# EAGLE board LeiterplatteEnergieversorgung (EAGLE 9.7.0)
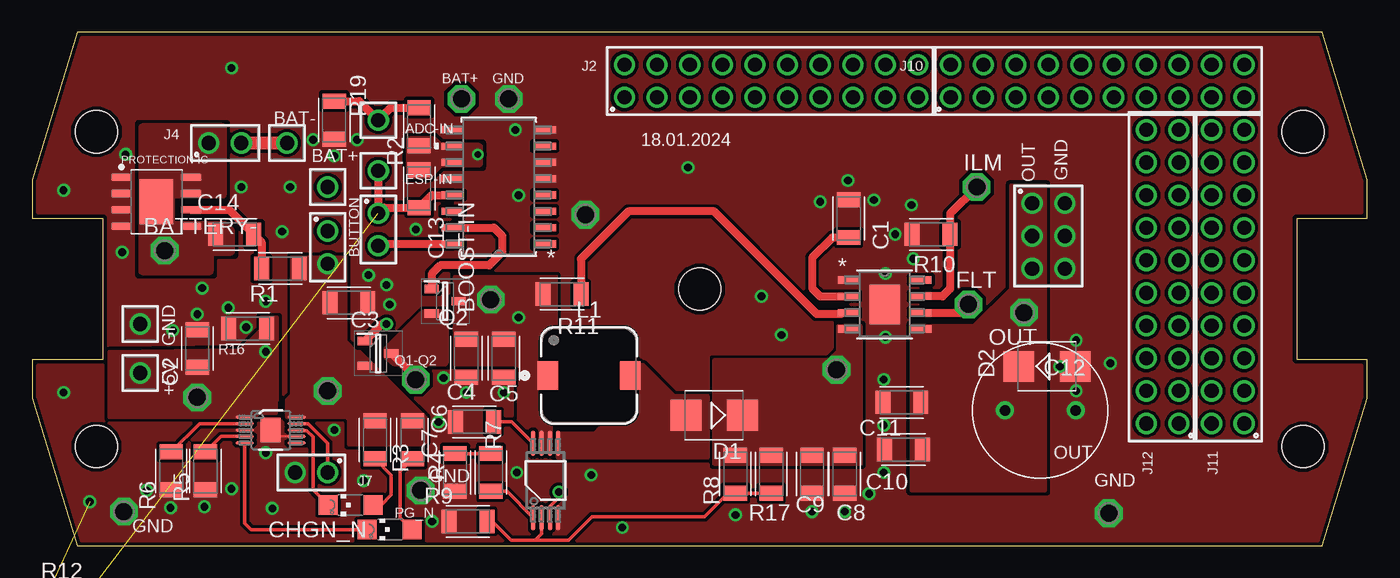
[diagram p0: board, top side]
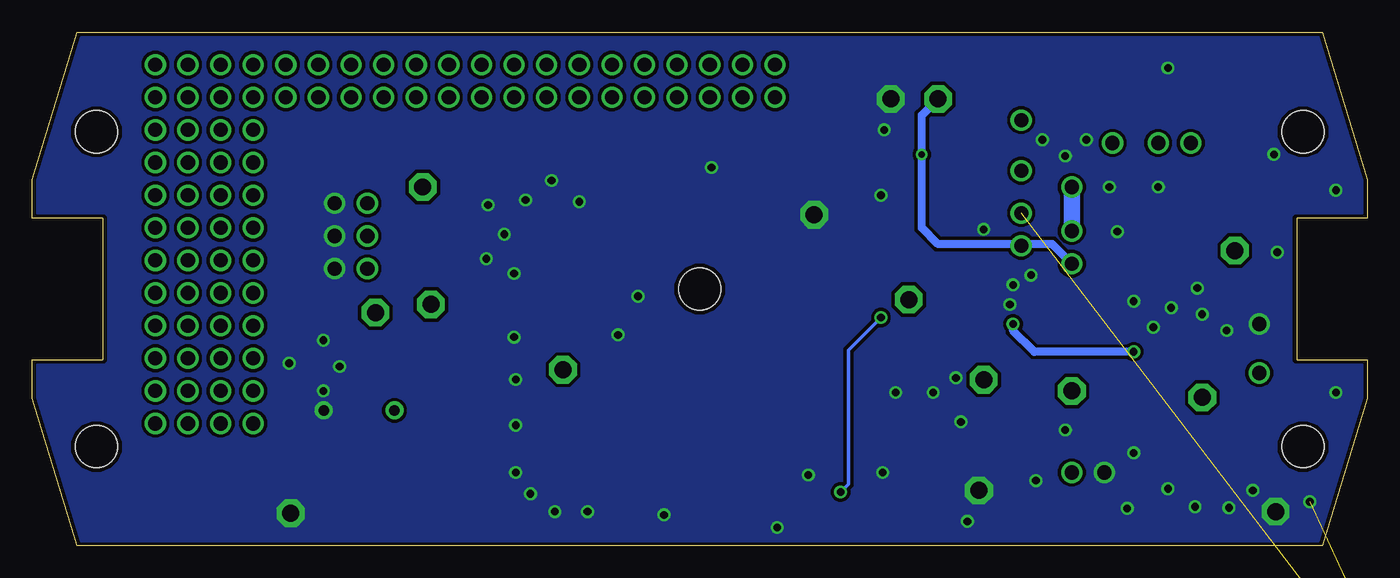
[diagram p1: board, bottom side, seen from below]

Size 104 x 40 mm. Coordinates in mm from the lower left corner, seen from the top.
Outline: 3.5,0 100.5,0 104,11.5 104,14.5 98.5,14.5 98.5,25.5 104,25.5 104,28.5 100.5,40 3.5,40 0,28.5 0,25.5 5.5,25.5 5.5,14.5 0,14.5 0,11.5 3.5,0
Copper layers (1*16): Top / Bottom
Stack-up Default Layer Stack: Top User Defined 0.035mm / Dielectric-1 User Defined 1.5mm / Bottom User Defined 0.035mm
Design rules: minimum copper width 0.2mm, minimum drill size 0.3mm, copper clearance wire_polygon to wire_polygon 0.15mm, copper clearance wire_polygon to pad_smd 0.15mm, copper clearance wire_polygon to via 0.15mm, copper clearance pad_smd to pad_smd 0.15mm, copper clearance pad_smd to via 0.15mm, copper clearance via to via 0.15mm, copper clearance smd to pad (same net) 0mil, copper clearance smd to via (same net) 0mil, copper clearance smd to smd (same net) 0mil, dimension clearance 0.3mm, via restrict clearance 0mil, restrict clearance 0mil, drill distance 0.3mm, keepout clearance 0mil
Holes 3.3 mm at 98.99,7.73 98.99,32.24 5.01,32.24 5.01,7.73 52,20

## Footprints (pad centres in the part's own frame; a part is rotated, then mirrored left to right if it is on the bottom)
61300111121 = drill 1.1: 1 0,0
DGQ0010D_NV_L = smd 1.45 x 0.25: 1 -2.025,1; 2 -2.025,0.5; 3 -2.025,0; 4 -2.025,-0.5; 5 -2.025,-1; 6 2.025,-1; 7 2.025,-0.5; 8 2.025,0; 9 2.025,0.5; 10 2.025,1 | smd 1.57 x 1.88: 11 0,0
P1-13 = drill 1.321 pad 2.159 octagon: TP 0,0
PW0008A_M = smd 2 x 0.35: 1 -2.9,0.975; 2 -2.9,0.325; 3 -2.9,-0.325; 4 -2.9,-0.975; 5 2.9,-0.975; 6 2.9,-0.325; 7 2.9,0.325; 8 2.9,0.975
61300211121 = drill 1.1: 1 -1.27,0; 2 1.27,0
CAPC3216X135 = smd 1.165 x 1.815: 1 -1.475,0; 2 1.475,0
CAPRD550W60D1025H1250B = drill 0.8 pad 1.4: 1 -2.75,0; 2 2.75,0
CHIPLED_1206 = smd 1.5 x 1.5: A 0,-1.75; C 0,1.75
SMB = smd 2.4 x 2.4: A 2.2,0; C -2.2,0
SOIC_20DDAR_TEX-M = smd 1.655 x 0.558: 1 -2.821,1.905; 2 -2.821,0.635; 3 -2.821,-0.635; 4 -2.821,-1.905; 5 2.821,-1.905; 6 2.821,-0.635; 7 2.821,0.635; 8 2.821,1.905 | smd 2.388 x 3.099: EPAD 0,0
NS16 = smd 1.741 x 0.558: 1 -3.581,4.445; 2 -3.581,3.175; 3 -3.581,1.905; 4 -3.581,0.635; 5 -3.581,-0.635; 6 -3.581,-1.905; 7 -3.581,-3.175; 8 -3.581,-4.445; 9 3.581,-4.445; 10 3.581,-3.175; 11 3.581,-1.905; 12 3.581,-0.635; 13 3.581,0.635; 14 3.581,1.905; 15 3.581,3.175; 16 3.581,4.445
61302021121 = drill 1.1: 1 -11.43,-1.27; 2 -11.43,1.27; 3 -8.89,-1.27; 4 -8.89,1.27; 5 -6.35,-1.27; 6 -6.35,1.27; 7 -3.81,-1.27; 8 -3.81,1.27; 9 -1.27,-1.27; 10 -1.27,1.27; 11 1.27,-1.27; 12 1.27,1.27; 13 3.81,-1.27; 14 3.81,1.27; 15 6.35,-1.27; 16 6.35,1.27; 17 8.89,-1.27; 18 8.89,1.27; 19 11.43,-1.27; 20 11.43,1.27
61300621121 = drill 1.1: 1 -2.54,-1.27; 2 -2.54,1.27; 3 0,-1.27; 4 0,1.27; 5 2.54,-1.27; 6 2.54,1.27
WE-PD_7345 = smd 1.6 x 2.2: 1 -3.2,0; 2 3.2,0
XB8089D = smd 1.6 x 0.61: 1 -2.7,1.905; 2 -2.7,0.635; 3 -2.7,-0.635; 4 -2.7,-1.905; 5 2.7,-1.905; 6 2.7,-0.635; 7 2.7,0.635; 8 2.7,1.905 | smd 2.62 x 3.51: 9 0,0
SOT96P240X110-3N = smd 1.1 x 0.65: 1 -1.05,0.96; 2 -1.05,-0.96; 3 1.05,0
RESC3216X70 = smd 1.165 x 1.815: 1 -1.475,0; 2 1.475,0

## Placement (x,y rotation side)
ADC-IN  [61300111121]  26.96,33.15 180 top
BAT-CHRGR  BQ24092DGQRDGQ0010D_NV_L  [DGQ0010D_NV_L]  18.58,9.02 0 top
BATTERY+  TPSQPAD1-13  [P1-13]  33.44,34.8 0 top
BATTERY+1  TPSQPAD1-13  [P1-13]  23.03,12.06 180 top
BATTERY-  TPSQPAD1-13  [P1-13]  10.33,22.99 0 top
BOOST-IC  TPS61085PWPW0008A_M  [PW0008A_M]  40,5.09 90 top
BOOST-IN  TPSQPAD1-13  [P1-13]  35.73,19.18 90 top
BOOST-OUT  TPSQPAD1-13  [P1-13]  62.65,13.72 90 top
BUTTON  [61300211121]  26.96,24.64 270 top
C1  10n  [CAPC3216X135]  63.6,25.48 270 top
C2  10u  [CAPC3216X135]  12.87,15.37 90 top
C3  10u  [CAPC3216X135]  24.68,18.92 0 top
C4  10u  [CAPC3216X135]  33.82,14.61 270 top
C5  1u  [CAPC3216X135]  36.74,14.61 270 top
C6  100n  [CAPC3216X135]  34.46,9.65 180 top
C7  3.3n  [CAPC3216X135]  32.93,5.71 270 top
C8  10u  [CAPC3216X135]  63.28,5.59 270 top
C9  10u  [CAPC3216X135]  60.74,5.59 270 top
C10  100n  [CAPC3216X135]  67.86,7.49 180 top
C11  470n  [CAPC3216X135]  67.73,11.18 180 top
C12  330u  [CAPRD550W60D1025H1250B]  78.53,10.54 0 top
C13  100n  [CAPC3216X135]  30.15,27.81 90 top
C14  10u  [CAPC3216X135]  15.79,24.26 180 top
CHGN_N  [CHIPLED_1206]  24.8,3.17 90 top
D1  [SMB]  53.12,10.16 180 top
D2  [SMB]  79.03,13.97 0 top
E-FUSE  TPS259620DDARSOIC_20DDAR_TEX-M  [SOIC_20DDAR_TEX-M]  66.4,18.8 0 top
ESP-IN  [61300111121]  26.96,29.21 180 top
FLIP-FLOP  CD4027BNSRNS16  [NS16]  36.34,27.95 180 top
FLT  TPSQPAD1-13  [P1-13]  72.94,18.8 0 top
GND  TPSQPAD1-13  [P1-13]  30.27,4.32 0 top
GND1  TPSQPAD1-13  [P1-13]  7.15,2.67 90 top
GND2  TPSQPAD1-13  [P1-13]  43.09,25.78 90 top
ILM  TPSQPAD1-13  [P1-13]  73.57,27.94 0 top
INPUT-CHARGER  TPSQPAD1-13  [P1-13]  12.87,11.56 90 top
J1  [61300111121]  8.42,17.27 0 top
J2  [61302021121]  57.57,36.2 0 top
J3  [61300111121]  23.03,27.94 0 top
J4  [61300211121]  15.03,31.37 0 top
J5  [61300211121]  23.03,23.24 270 top
J6  [61300111121]  19.85,31.37 0 top
J7  [61300211121]  21.76,5.71 180 top
J8  [61300111121]  8.42,13.46 0 top
J9  [61300621121]  79.16,24.13 270 top
J10  [61302021121]  82.97,36.2 0 top
J11  [61302021121]  93.13,20.95 90 top
J12  [61302021121]  88.05,20.95 90 top
L1  3.3uH  [WE-PD_7345]  43.37,13.26 0 top
OUT  TPSQPAD1-13  [P1-13]  77.25,18.16 180 top
PG_N  [CHIPLED_1206]  27.85,1.27 90 top
PROTECTION-IC  XB8089D  [XB8089D]  9.69,26.8 0 top
Q1  DMP3098L-7  [SOT96P240X110-3N]  26.96,14.99 0 top
Q1-Q2  TPSQPAD1-13  [P1-13]  29.88,12.94 180 top
Q2  DMP3098L-7  [SOT96P240X110-3N]  32.17,19.05 0 top
R1  1k  [RESC3216X70]  19.34,21.59 180 top
R2  100k  [RESC3216X70]  30.14,32.64 90 top
R3  1.5k  [RESC3216X70]  26.71,8.26 90 top
R4  1.5k  [RESC3216X70]  29.63,8.26 90 top
R5  1k  [RESC3216X70]  13.5,5.84 90 top
R6  526  [RESC3216X70]  10.83,5.84 90 top
R7  13k  [RESC3216X70]  35.73,5.71 270 top
R8  84,5k  [RESC3216X70]  54.78,5.59 90 top
R9  18k  [RESC3216X70]  33.95,1.91 0 top
R10  500  [RESC3216X70]  70.02,24.26 0 top
R11  100k  [RESC3216X70]  41.27,19.6 0 top
R12  10k  [RESC3216X70]  2.33,-4.45 0 top  (outside the outline)
R16  100k  [RESC3216X70]  16.8,16.92 0 top
R17  158k  [RESC3216X70]  57.57,5.59 90 top
R19  100k  [RESC3216X70]  23.53,33.15 270 top
TP16  TPSQPAD1-13  [P1-13]  37.12,34.8 0 top
USB-GND  TPSQPAD1-13  [P1-13]  83.86,2.54 0 top

## Library data of the parts
ADC-IN ESP-IN J1 J3 J6 J8 = 61001021121_Eagle_WR-PHD_rev19a; DATASHEET-URL: https://katalog.we-online.com/em/datasheet/61300111121.pdf; GENDER: Pin Header; IR: 3A; MATES: WR-PHD 2.54mm Angled Socket Header /SMT Socket Header/Socket Header; PACKAGING: Bag; PART-NUMBER: 61300111121; PINS: 1; ROWS: Single; TYPE: Straight
BAT-CHRGR = BQ24092DGQR; COPYRIGHT: Copyright (C) 2023 Ultra Librarian. All rights reserved.; MANUFACTURER_PART_NUMBER: BQ24092DGQR; MFR_NAME: Texas Instruments; REFDES: RefDes; TYPE: TYPE
BATTERY+ BATTERY+1 BATTERY- BOOST-IN BOOST-OUT FLT GND GND1 GND2 ILM INPUT-CHARGER OUT Q1-Q2 TP16 USB-GND = testpad
BOOST-IC = Bibliothek; COPYRIGHT: Copyright (C) 2023 Ultra Librarian. All rights reserved.; MANUFACTURER_PART_NUMBER: TPS61085PW; MFR_NAME: Texas Instruments; REFDES: RefDes; TYPE: TYPE
BUTTON J4 J5 J7 = 61001021121_Eagle_WR-PHD_rev19a; DATASHEET-URL: https://katalog.we-online.com/em/datasheet/61300211121.pdf; GENDER: Pin Header; IR: 3A; MATES: WR-PHD 2.54mm Angled Socket Header /SMT Socket Header/Socket Header; PACKAGING: Bag; PART-NUMBER: 61300211121; PINS: 2; ROWS: Single; TYPE: Straight
C1-C14 = Capacitor; CATEGORY: Capacitor
CHGN_N PG_N = LED
D1 D2 = Diode
E-FUSE = TPS259620DDAR; COPYRIGHT: Copyright (C) 2023 Ultra Librarian. All rights reserved.; MANUFACTURER_PART_NUMBER: TPS259620DDAR; MFR_NAME: Texas Instruments
FLIP-FLOP = CD4027B; COPYRIGHT: Copyright (C) 2023 Ultra Librarian. All rights reserved.; MANUFACTURER_PART_NUMBER: CD4027BNSR; MFR_NAME: Texas Instruments
J2 J10-J12 = 61001021121_Eagle_WR-PHD_rev19a; DATASHEET-URL: https://katalog.we-online.com/em/datasheet/61302021121.pdf; GENDER: Pin Header; IR: 3A; MATES: WR-PHD 2.54mm Angled DualSocket Header/Dual Socket Header/Dual Socket Header Bottom Entry/Dual Socket Header Bottom Entry Large/SMT Dual Socket Header/SMT Dual Socket Header Bottom Entry; PACKAGING: Bag; PART-NUMBER: 61302021121; PINS: 20; ROWS: Dual; TYPE: Board Stacker
J9 = 61001021121_Eagle_WR-PHD_rev19a; DATASHEET-URL: https://katalog.we-online.com/em/datasheet/61300621121.pdf; GENDER: Pin Header; IR: 3A; MATES: WR-PHD 2.54mm Angled DualSocket Header/Dual Socket Header/Dual Socket Header Bottom Entry/Dual Socket Header Bottom Entry Large/SMT Dual Socket Header/SMT Dual Socket Header Bottom Entry; PACKAGING: Bag; PART-NUMBER: 61300621121; PINS: 6; ROWS: Dual; TYPE: Board Stacker
L1 = Eagle_WE-PD; DATASHEET-URL: https://www.we-online.com/redexpert/spec/744777001?ae; FRES: 100MHz; IR: 6.84A; ISAT: 10.2A; MOUNT: SMT; PART-NUMBER: 744777001; RDC-MAX: 10mohm; RDC-TYP: 8.4mohm; SIZE: 7345; VERSION: Standard
PROTECTION-IC = XB8089D
Q1 Q2 = DMP3098L; DESCRIPTION: P-CHANNEL ENHANCEMENT MODE MOSFET; HEIGHT: 1.1mm; MANUFACTURER_NAME: Diodes Incorporated; MANUFACTURER_PART_NUMBER: DMP3098L-7; MOUSER_PART_NUMBER: 621-DMP3098L-7; MOUSER_PRICE-STOCK: https://www.mouser.co.uk/ProductDetail/Diodes-Incorporated/DMP3098L-7?qs=ptj1V1atRAptfFGa76gfNw%3D%3D
R1-R12 R16 R17 R19 = Resistor; CATEGORY: Resistor; SUB-CATEGORY: Fixed

## Nets
+5V: BAT-CHRGR.1 C2.1 INPUT-CHARGER.TP J8.1 Q1.1 R16.2
ADC-IN: ADC-IN.1 R2.2 R19.1
BAT-IN+: J3.1 J5.1
BAT-IN-: J4.2 J6.1
BATTERY+: BAT-CHRGR.10 BATTERY+1.TP BATTERY+.TP BUTTON.2 C3.1 C13.2 FLIP-FLOP.10 FLIP-FLOP.11 FLIP-FLOP.16 J5.2 Q1.2 R1.1 R2.1 R3.2 R4.2
BATTERY-: BATTERY-.TP C14.2 J4.1 PROTECTION-IC.5 PROTECTION-IC.7 PROTECTION-IC.8 PROTECTION-IC.9
BOOST-IN: BOOST-IC.3 BOOST-IC.6 BOOST-IC.7 BOOST-IN.TP C4.1 C5.1 L1.1 Q2.3 R11.1
BOOST-OUT: BOOST-OUT.TP C8.1 C9.1 D1.C E-FUSE.4 R8.2 R17.2
CHGN_N: BAT-CHRGR.8 CHGN_N.C
COMP: BOOST-IC.1 R7.2
DV/DT: C1.2 E-FUSE.2
EN: E-FUSE.3 R11.2
FB: BOOST-IC.2 R8.1 R9.2 R17.1
FF-IN: BUTTON.1 C13.1 ESP-IN.1 FLIP-FLOP.13 R12.2
FF-OUT: FLIP-FLOP.15 Q2.1
FLT: E-FUSE.6 FLT.TP
GND: BAT-CHRGR.3 BAT-CHRGR.7 BAT-CHRGR.11 BOOST-IC.4 C1.1 C2.2 C3.2 C4.2 C5.2 C6.2 C7.2 C8.2 C9.2 C10.2 C11.2 C12.2 D2.A E-FUSE.1 E-FUSE.EPAD FLIP-FLOP.5 FLIP-FLOP.6 FLIP-FLOP.8 FLIP-FLOP.9 FLIP-FLOP.12 GND1.TP GND2.TP GND.TP J1.1 J7.2 J9.2 J9.4 J9.6 PROTECTION-IC.1 PROTECTION-IC.2 PROTECTION-IC.3 PROTECTION-IC.4 R5.1 R6.1 R9.1 R10.1 R12.1 R16.1 R19.2 TP16.TP USB-GND.TP
ILM: E-FUSE.7 ILM.TP R10.2
ISET: BAT-CHRGR.2 R6.2
N$3: C14.1 PROTECTION-IC.6 R1.2
N$9: CHGN_N.A R3.1
N$10: PG_N.A R4.1
N$19: C7.1 R7.1
OUT: C10.1 C11.1 C12.1 D2.C E-FUSE.5 J9.1 J9.3 J9.5 OUT.TP
PG_N: BAT-CHRGR.5 PG_N.C
PRE-TERM: BAT-CHRGR.4 R5.2
Q1-Q2: Q1-Q2.TP Q1.3 Q2.2
SS: BOOST-IC.8 C6.1
SW: BOOST-IC.5 D1.A L1.2
TS: BAT-CHRGR.9 J7.1

## Tracks (layer width: path | path; a pad name or v marks a point on that pad's centre or on a via)
+5V  (via drill 0.6)
  Top 0.61: Q1.1 27.24,17.27 v27.6,17.27
  Bottom 0.61: v18.2,15.11 25.95,15.11 27.6,16.76 v27.6,17.27
  pour Top (isolate 0.254, no thermals): 5.88,9.91 5.88,15.24 16.17,15.37 17.69,16.89 17.69,17.91 19.22,17.91 19.22,11.29 19.11,11.18 19.11,9.91
ADC-IN
  Top 0.61: R2.2 27.93,34.11 ADC-IN.1 25.49,34.62 R19.1
BAT-IN+
  Bottom 1.27: J3.1 J5.1
BAT-IN-
  Top 1.016: J4.2 J6.1
BATTERY+  (via drill 0.5)
  Top 0.61: BUTTON.2 27.1,23.5 FLIP-FLOP.16
  Bottom 0.61: BUTTON.2 27.09,23.5 | 27.09,23.5 33.44,23.5 34.71,24.77 v34.71,30.48 34.71,33.53 BATTERY+.TP | J5.2 24.55,23.5 27.09,23.5
  pour Top (isolate 0.254, no thermals): 24.55,22.61 20.11,22.61 20.11,11.81 19.72,11.43 19.72,9.91 24.42,9.91 24.55,9.78 24.55,7.75 30.52,7.75 30.77,8 30.77,10.06 25.6,15.24 25.28,15.24 24.55,15.97
  pour Top (isolate 0.254, no thermals): 29.12,31.88 29.12,28.57 31.03,28.57 31.92,29.46 35.09,29.46 35.09,31.37 31.92,31.37 31.41,31.88
BATTERY-
  Top 0.2: PROTECTION-IC.8 12.6,28.91
  pour Top (isolate 0.254, no thermals): 14.14,21.08 14.14,22.61 15.79,22.61 15.79,24.64 15.15,25.27 11.09,25.27 11.09,27.05 15.15,27.05 15.15,32.89 8.29,32.89 8.29,21.08
BOOST-IN  (via drill 0.6)
  Top 0.254: v41.03,4.19 41.03,3.78 40.32,3.07 BOOST-IC.3
  Bottom 0.254: v37.88,17.78 40.42,15.24 40.42,4.8 v41.03,4.19
  pour Top (isolate 0.254, no thermals): 32.8,21.08 32.8,13.97 37.76,13.97 37.76,9.1 39.41,9.02 39.41,7.24 40.55,7.24 40.55,9.46 40.93,9.84 40.93,21.08
BOOST-OUT
  pour Top (isolate 0.254, no thermals): 53,14.61 53,6.22 64.68,6.22 64.68,17.27 62.65,17.27 62.65,15.24 62.02,14.61
CHGN_N
  Top 0.254: BAT-CHRGR.8 20.65,8.97 21.39,8.97 21.87,8.49 21.87,4.36 CHGN_N.C
COMP
  Top 0.254: R7.2 36.97,4.24 BOOST-IC.1
DV/DT
  Top 0.61: C1.2 62.33,24.01 60.74,22.42 60.74,20.07 61.38,19.43 E-FUSE.2
EN
  Top 0.254: E-FUSE.3 63.48,18.06 63.01,18.06
  Top 0.61: 63.01,18.06 61.1,18.06 53.12,26.04 46.44,26.04 42.75,22.34 R11.2
FB
  Top 0.254: R9.2 35.83,1.91 37.31,0.43 39.16,0.43 | 54.68,4.01 54.13,4.01 52.38,2.26 43.6,2.26 41.76,0.43 39.16,0.43 | BOOST-IC.2 39.67,0.95 39.34,0.61 39.16,0.43 | R8.1 R17.1
  Top 0.35: R8.1 54.68,4.01
FF-IN  (1 unrouted)
  Top 0.61: ESP-IN.1 BUTTON.1 27.39,26.34 C13.1 31.12,27.32 FLIP-FLOP.13
FF-OUT
  Top 0.61: FLIP-FLOP.15 35.97,24.77 36.61,24.13 36.61,22.86 35.6,21.84 31.79,21.84 31.12,21.18 Q2.1
FLT
  Top 0.61: E-FUSE.6 72.3,18.16 FLT.TP
GND  (via drill 0.6)  (1 unrouted)
  Top 0.2: BAT-CHRGR.7 19.08,8.52 BAT-CHRGR.11
  other vias: 56.81,19.43 54.78,2.41 60.74,2.67 63.28,2.67 65.19,4.06 66.33,5.71 66.33,12.95 66.33,9.4 81.32,12.06 81.32,16 80.05,13.97 15.53,37.21 83.99,14.22 51.09,29.46 67.22,24.26 68.49,26.54 68.62,22.35 66.46,21.21 66.46,16.26 61.38,26.8 63.54,28.45 65.57,26.92 31.15,1.91 15.53,4.45 18.2,7.24 13.25,20.07 8.93,4.32 18.71,2.92 10.96,16.76 12.87,18.03 15.28,18.54 16.68,17.02 16.3,27.94 20.11,27.94 23.53,30.35 21.88,31.62 25.31,31.62 29.88,24.64 37.88,27.3 37.63,32.38 33.82,11.94 36.74,11.94 31.66,9.65 19.47,24.47 27.85,18.8 26.2,21.08 27.6,20.32 2.45,11.94 4.48,3.43 7.02,22.86 2.45,27.69 7.28,30.48 18.2,19.05 25.82,5.08 23.53,9.02 37.76,5.71 43.54,5.52 45.97,1.44 32.04,13.08 10.78,2.97 13.42,3.05 58.37,16.42
  pour Top (isolate 0.254, rank 4, no thermals): 0,14.5 0,11.5 3.5,0 100.5,0 104,11.5 104,14.5 98.5,14.5 98.5,25.5 104,25.5 104,28.5 100.5,40 3.5,40 0,28.5 0,25.5 5.5,25.5 5.5,14.5
  pour Bottom (isolate 0.254, rank 4, no thermals): 0,14.5 0,11.5 3.5,0 100.5,0 104,11.5 104,14.5 98.5,14.5 98.5,25.5 104,25.5 104,28.5 100.5,40 3.5,40 0,28.5 0,25.5 5.5,25.5 5.5,14.5
ILM
  Top 0.61: E-FUSE.7 70.91,19.43 71.49,20.02 R10.2 71.49,25.86 ILM.TP
ISET
  Top 0.254: BAT-CHRGR.2 13.03,9.52 R6.2
N$3
  Top 0.61: 15.1,26.16 15.36,26.16 C14.1 17.87,23.65 R1.2
  Top 0.635: PROTECTION-IC.6 15.1,26.16
N$9
  Top 0.254: CHGN_N.A 27.19,3.17 27.98,3.96 27.98,5.51 R3.1
N$10
  Top 0.254: R4.1 28.68,5.83 28.68,2.19 PG_N.A
N$19
  Top 0.254: R7.1 C7.1
OUT
  pour Top (isolate 0.254, no thermals): 68.37,17.27 68.37,4.19 79.03,4.19 79.03,28.19 76.11,28.19 76.11,20.07 73.32,17.27
PG_N
  Top 0.254: BAT-CHRGR.5 16.56,1.77 17.06,1.27 PG_N.C
PRE-TERM
  Top 0.254: BAT-CHRGR.4 14.71,8.52 13.51,7.32 R5.2
Q1-Q2
  Top 0.61: Q1.3 29.88,13.12 Q1-Q2.TP
  pour Top (isolate 0.254, no thermals): 27.34,14.61 28.17,13.97 32.42,13.97 32.42,18.41 30.39,18.41 27.34,15.37
SS
  Top 0.254: BOOST-IC.8 37.36,9.65 C6.1
SW
  pour Top (isolate 0.254, no thermals): 40.81,6.73 40.81,8.89 43.76,8.89 45.76,10.89 45.76,14.22 47.66,14.22 50.08,11.81 52.74,11.81 52.74,6.73
TS
  Top 0.254: BAT-CHRGR.9 21.51,9.52 23.03,8 J7.1

## Text on the board
tNames: BAT+ | GND | BAT- | 18.01.2024 | BAT+ | OUT | GND | GND | +5V | OUT | GND | GND